# EAGLE board h2oiq_v3 (EAGLE 6.3)
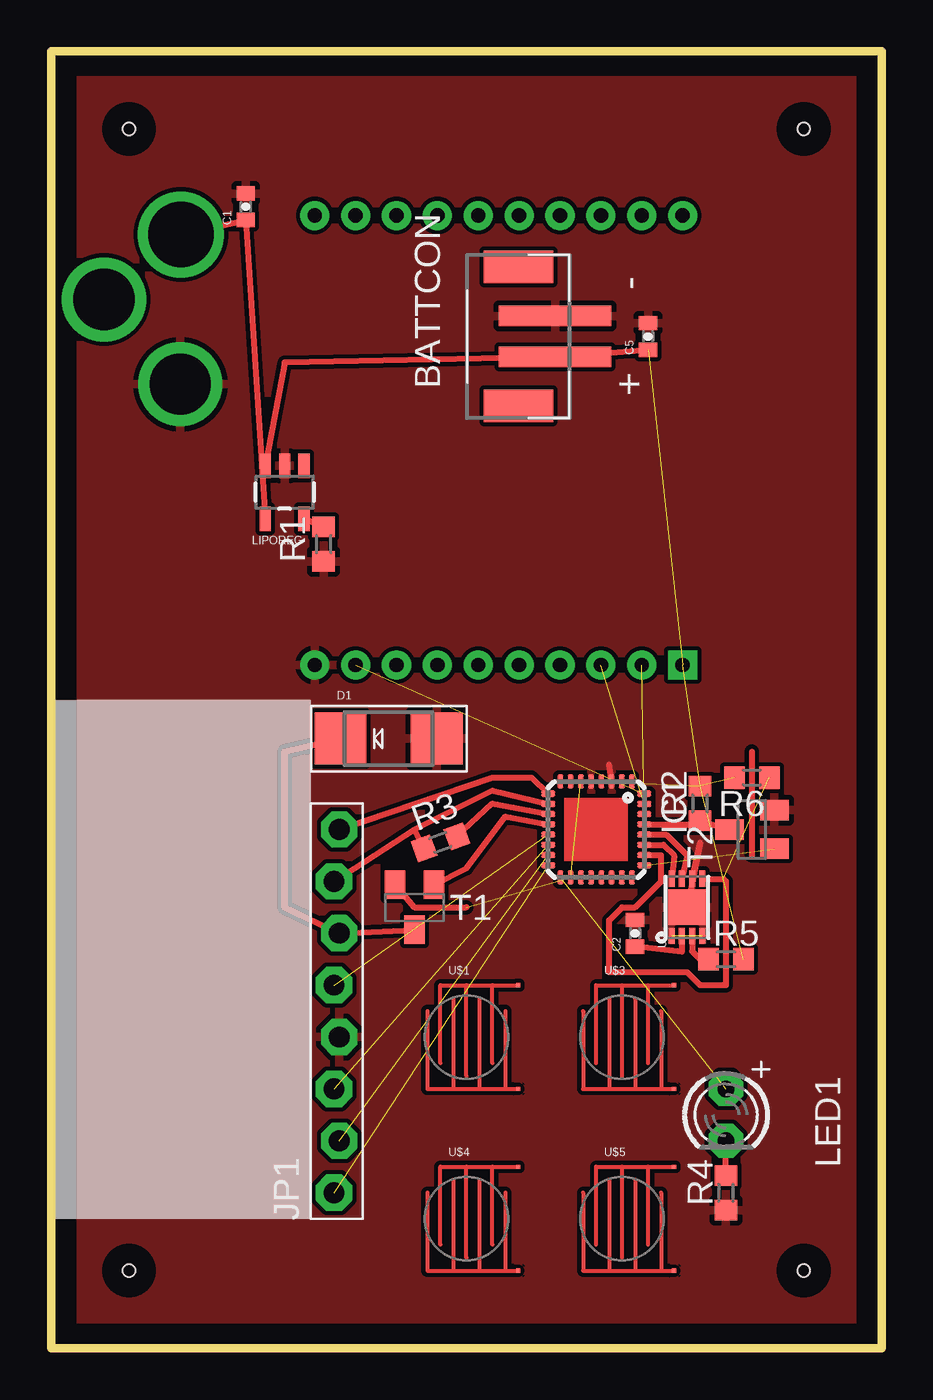
[diagram p0: board, top side]
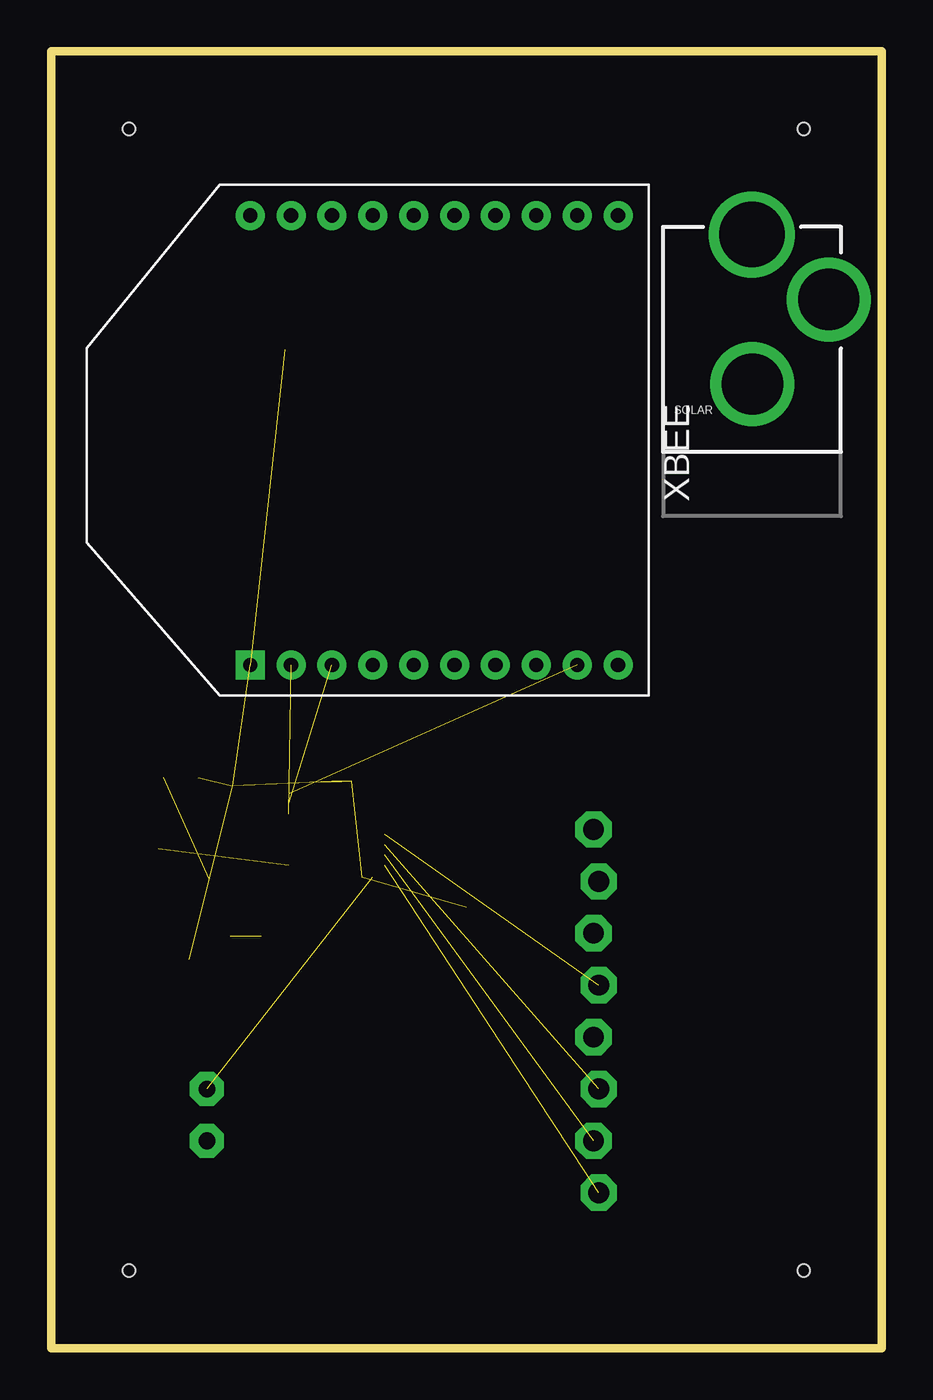
[diagram p1: board, bottom side, seen from below]

Size 40.64 x 63.5 mm. Coordinates in mm from the lower left corner, seen from the top.
Outline: 0,0 40.64,0 40.64,63.5 0,63.5 0,0
Copper layers (1*16): Top 0.035mm / dielectric 1.5mm / Bottom 0.035mm
Design rules "default": minimum track width 10mil, minimum drill 24mil, track to track 8mil, track to pad 8mil, pad to pad 8mil, via to via 8mil, smd to smd 8mil, copper to edge 40mil, drill to drill 8mil, minimum pad ring 10mil, minimum via ring 8mil, stop-mask expansion 4mil, vias tented up to drill 0mil, thermal gap 10mil
Holes 0.6 mm at 3.81,59.69 36.83,59.69 3.81,3.81 36.83,3.81

## Footprints (pad centres in the part's own frame; a part is rotated, then mirrored left to right if it is on the bottom)
JST-PH-2-SMT = smd 1 x 5.5: 1 -1,-1.8; 2 1,-1.8 | smd 1.6 x 3.4: NC1 -3.4,0; NC2 3.4,0
0402-CAP = smd 0.7 x 0.9: 1 -0.65,0; 2 0.65,0
SMADIODE = smd 2.54 x 2.54: A 2.349,0; C -2.349,0
MLF32 = smd 0.7 x 0.3: 1 -2.35,1.75; 2 -2.35,1.25; 3 -2.35,0.75; 4 -2.35,0.25; 5 -2.35,-0.25; 6 -2.35,-0.75; 7 -2.35,-1.25; 8 -2.35,-1.75; 17 2.35,-1.75; 18 2.35,-1.25; 19 2.35,-0.75; 20 2.35,-0.25; 21 2.35,0.25; 22 2.35,0.75; 23 2.35,1.25; 24 2.35,1.75 | smd 0.3 x 0.7: 9 -1.75,-2.35; 10 -1.25,-2.35; 11 -0.75,-2.35; 12 -0.25,-2.35; 13 0.25,-2.35; 14 0.75,-2.35; 15 1.25,-2.35; 16 1.75,-2.35; 25 1.75,2.35; 26 1.25,2.35; 27 0.75,2.35; 28 0.25,2.35; 29 -0.25,2.35; 30 -0.75,2.35; 31 -1.25,2.35; 32 -1.75,2.35
1X08-LOCK = drill 1.016 pad 1.778 octagon: 1 -8.89,0.127; 2 -6.35,-0.127; 3 -3.81,0.127; 4 -1.27,-0.127; 5 1.27,0.127; 6 3.81,-0.127; 7 6.35,0.127; 8 8.89,-0.127
LED3MM = drill 0.813 pad 1.676 octagon: A -1.27,0; K 1.27,0
SOT23-5 = smd 0.55 x 1.2: 1 -0.95,-1.3; 2 0,-1.3; 3 0.95,-1.3; 4 0.95,1.3; 5 -0.95,1.3
R0603 = smd 1 x 1.1: 1 -0.85,0; 2 0.85,0
POWER_JACK_PTH_LOCK = drill 2.997 pad 4.115: GND 0.025,6.557; GNDBREAK 3.762,10.7 | drill 3.2 pad 4.115: PWR 0,13.878
SOT23-BEC = smd 1 x 1.4: B -0.95,-1.1; C 0,1.1; E 0.95,-1.1
SOT23 = smd 1 x 1.4: 1 -0.95,-1.1; 2 0.95,-1.1; 3 0,1.1
TDFN-8 = smd 0.8 x 0.3: 1 -1.4,0.75; 2 -1.4,0.25; 3 -1.4,-0.25; 4 -1.4,-0.75; 5 1.4,-0.75; 6 1.4,-0.25; 7 1.4,0.25; 8 1.4,0.75 | smd 1.73 x 1.88: EP 0,0
BUTTON-CONDUCTIVE = smd 0.203 x 0.203: 1 2.54,2.54; 2 2.54,-2.54
XBEE = drill 0.7 pad 1.422 square: 1 -11,5.5 | drill 0.7 pad 1.422: 2 -11,3.5; 3 -11,1.5; 4 -11,-0.5; 5 -11,-2.5; 6 -11,-4.5; 7 -11,-6.5; 8 -11,-8.5; 9 -11,-10.5; 10 -11,-12.5; 11 11,-12.5; 12 11,-10.5; 13 11,-8.5; 14 11,-6.5; 15 11,-4.5; 16 11,-2.5; 17 11,-0.5; 18 11,1.5; 19 11,3.5; 20 11,5.5

## Placement (x,y rotation side)
BATTCON  [JST-PH-2-SMT]  22.86,49.53 90 top
C1  4.7uF  [0402-CAP]  9.53,55.88 90 top
C2  1uF  [0402-CAP]  28.57,20.32 90 top
C5  4.7uF  [0402-CAP]  29.21,49.53 90 top
D1  [SMADIODE]  16.51,29.84 0 top
IC1  MEGA88  [MLF32]  26.67,25.4 270 top
JP1  [1X08-LOCK]  13.97,16.51 90 top
LED1  [LED3MM]  33.02,11.43 270 top
LIPOREG  MCP73831  [SOT23-5]  11.43,41.91 180 top
R1  10K  [R0603]  13.34,39.37 90 top
R2  10K  [R0603]  31.75,26.67 90 top
R3  10K  [R0603]  19.05,24.77 20 top
R4  1K  [R0603]  33.02,7.62 90 top
R5  10K  [R0603]  33.02,19.05 0 top
R6  4.7K  [R0603]  34.29,27.94 180 top
SOLAR  POWER_JACKPTH_LOCK  [POWER_JACK_PTH_LOCK]  6.35,40.64 0 bottom
T1  [SOT23-BEC]  17.78,21.59 180 top
T2  BC846  [SOT23]  34.29,25.4 90 top
U1  MAX1704X  [TDFN-8]  31.11,21.59 90 top
U$1  BUTTON-CONDUCTIVESMD  [BUTTON-CONDUCTIVE]  20.32,15.24 0 top
U$3  BUTTON-CONDUCTIVESMD  [BUTTON-CONDUCTIVE]  27.94,15.24 0 top
U$4  BUTTON-CONDUCTIVESMD  [BUTTON-CONDUCTIVE]  20.32,6.35 0 top
U$5  BUTTON-CONDUCTIVESMD  [BUTTON-CONDUCTIVE]  27.94,6.35 0 top
XBEE  XBEE  [XBEE]  25.4,44.45 90 bottom

## Library data of the parts
BATTCON D1 JP1 LED1 XBEE = adafruit
C1 C2 C5 LIPOREG SOLAR U1 U$1 U$3-U$5 = SparkFun
IC1 = avr-7
R1 R3 = resistor
R2 R4-R6 = rcl
T1 T2 = transistor

## Nets
AGND: IC1.21
GND: BATTCON.2 C1.2 C2.2 C5.2 D1.A IC1.3 IC1.5 JP1.4 LIPOREG.2 R1.1 R4.1 SOLAR.GND T2.2 U1.1 U1.4 U1.6 U1.EP U$1.2 U$3.2 U$4.2 U$5.2 XBEE.10
N$1: C1.1 LIPOREG.4 SOLAR.PWR
N$2: LIPOREG.5 R1.2
N$3: IC1.29 R2.1 T2.3
N$4: IC1.12 T1.B
N$5: D1.C JP1.6 T1.C
N$6: IC1.27 U1.8
N$7: IC1.28 U1.7
N$8: IC1.32 XBEE.9
N$9: IC1.15 JP1.2
N$10: IC1.17 LED1.A
N$11: LED1.K R4.2
N$12: U$4.1
N$13: IC1.14 JP1.3
N$14: IC1.16 JP1.1
N$15: IC1.10 JP1.7 R3.1
N$16: IC1.26 R6.1 U1.5
N$17: IC1.30 XBEE.2
N$18: U$1.1
N$19: IC1.31 XBEE.3
N$20: U$5.1
N$21: U$3.1
N$23: C2.1 U1.2
N$24: R5.1 U1.3
N$26: IC1.13 JP1.5
N$27: IC1.11 R3.2
N$28: IC1.9 JP1.8
N$29: IC1.25 T2.1
VCC: BATTCON.1 C5.1 IC1.4 IC1.6 IC1.18 LIPOREG.3 R2.2 R5.2 R6.2 T1.E XBEE.1

## Tracks (layer width: path | path; a pad name or v marks a point on that pad's centre or on a via)
GND  (2 unrouted)
  Top 0.305: IC1.3 27.3,28.57 | U1.6 31.75,24.77 U1.EP
  pour Top: -1.27,69.85 -1.27,-1.27 41.91,-1.27 41.91,69.85
N$1
  Top 0.305: LIPOREG.4 C1.1 SOLAR.PWR
N$2
  Top 0.305: LIPOREG.5 R1.2
N$3
  Top 0.305: IC1.29 31.58,25.65 R2.1 T2.3
N$4
  Top 0.305: IC1.12 22.23,26.04 20.32,23.5 T1.B
N$5
  Top 0.305: D1.C 11.43,29.21 11.43,21.59 JP1.6 T1.C
N$6
  Top 0.305: IC1.27 29.96,24.65 30.48,24.13 U1.8
N$7
  Top 0.305: IC1.28 30.09,25.15 31.11,24.13 U1.7
N$8  (1 unrouted)
N$9  (1 unrouted)
N$10  (1 unrouted)
N$11
  Top 0.305: R4.2 LED1.K
N$13  (1 unrouted)
N$14  (1 unrouted)
N$15
  Top 0.305: R3.1 17.78,25.4 | 17.78,25.4 21.59,27.3 IC1.10 | JP1.7 17.78,25.4
N$16  (1 unrouted)
  Top 0.305: U1.5 32.89,22.99 33.02,22.86 33.02,17.78 31.75,17.78 31.11,18.41 27.3,18.41 27.3,20.95 27.94,21.59 28.57,21.59 29.84,22.86 29.84,24.13 29.04,24.13 IC1.26
N$17  (1 unrouted)
N$19  (1 unrouted)
N$23
  Top 0.305: U1.2 30.86,19.42 C2.1
N$24
  Top 0.305: U1.3 31.36,19.43 31.75,19.05 R5.1
N$26  (1 unrouted)
N$27
  Top 0.305: R3.2 21.59,26.67 IC1.11
N$28
  Top 0.305: JP1.8 21.59,27.94 23.5,27.94 IC1.9
N$29  (1 unrouted)
N$31
  Top 0.305: 34.29,29.21 34.29,24.13
VCC  (8 unrouted)
  Top 0.305: C5.1 BATTCON.1 11.43,48.26 LIPOREG.3 | T1.E 17.78,21.59 20.32,21.59